# Altium PCB ConnectorBoard_PCB_r2.PcbDoc
Units mm, origin at the board's own origin, x right, y up, seen from the top; angles counter-clockwise.
Board outline 80 x 75 mm, 2 copper layers (Top Layer, Bottom Layer), stack 1.671 mm thick; 15 components, 16 nets, 61 pads, 0 vias.
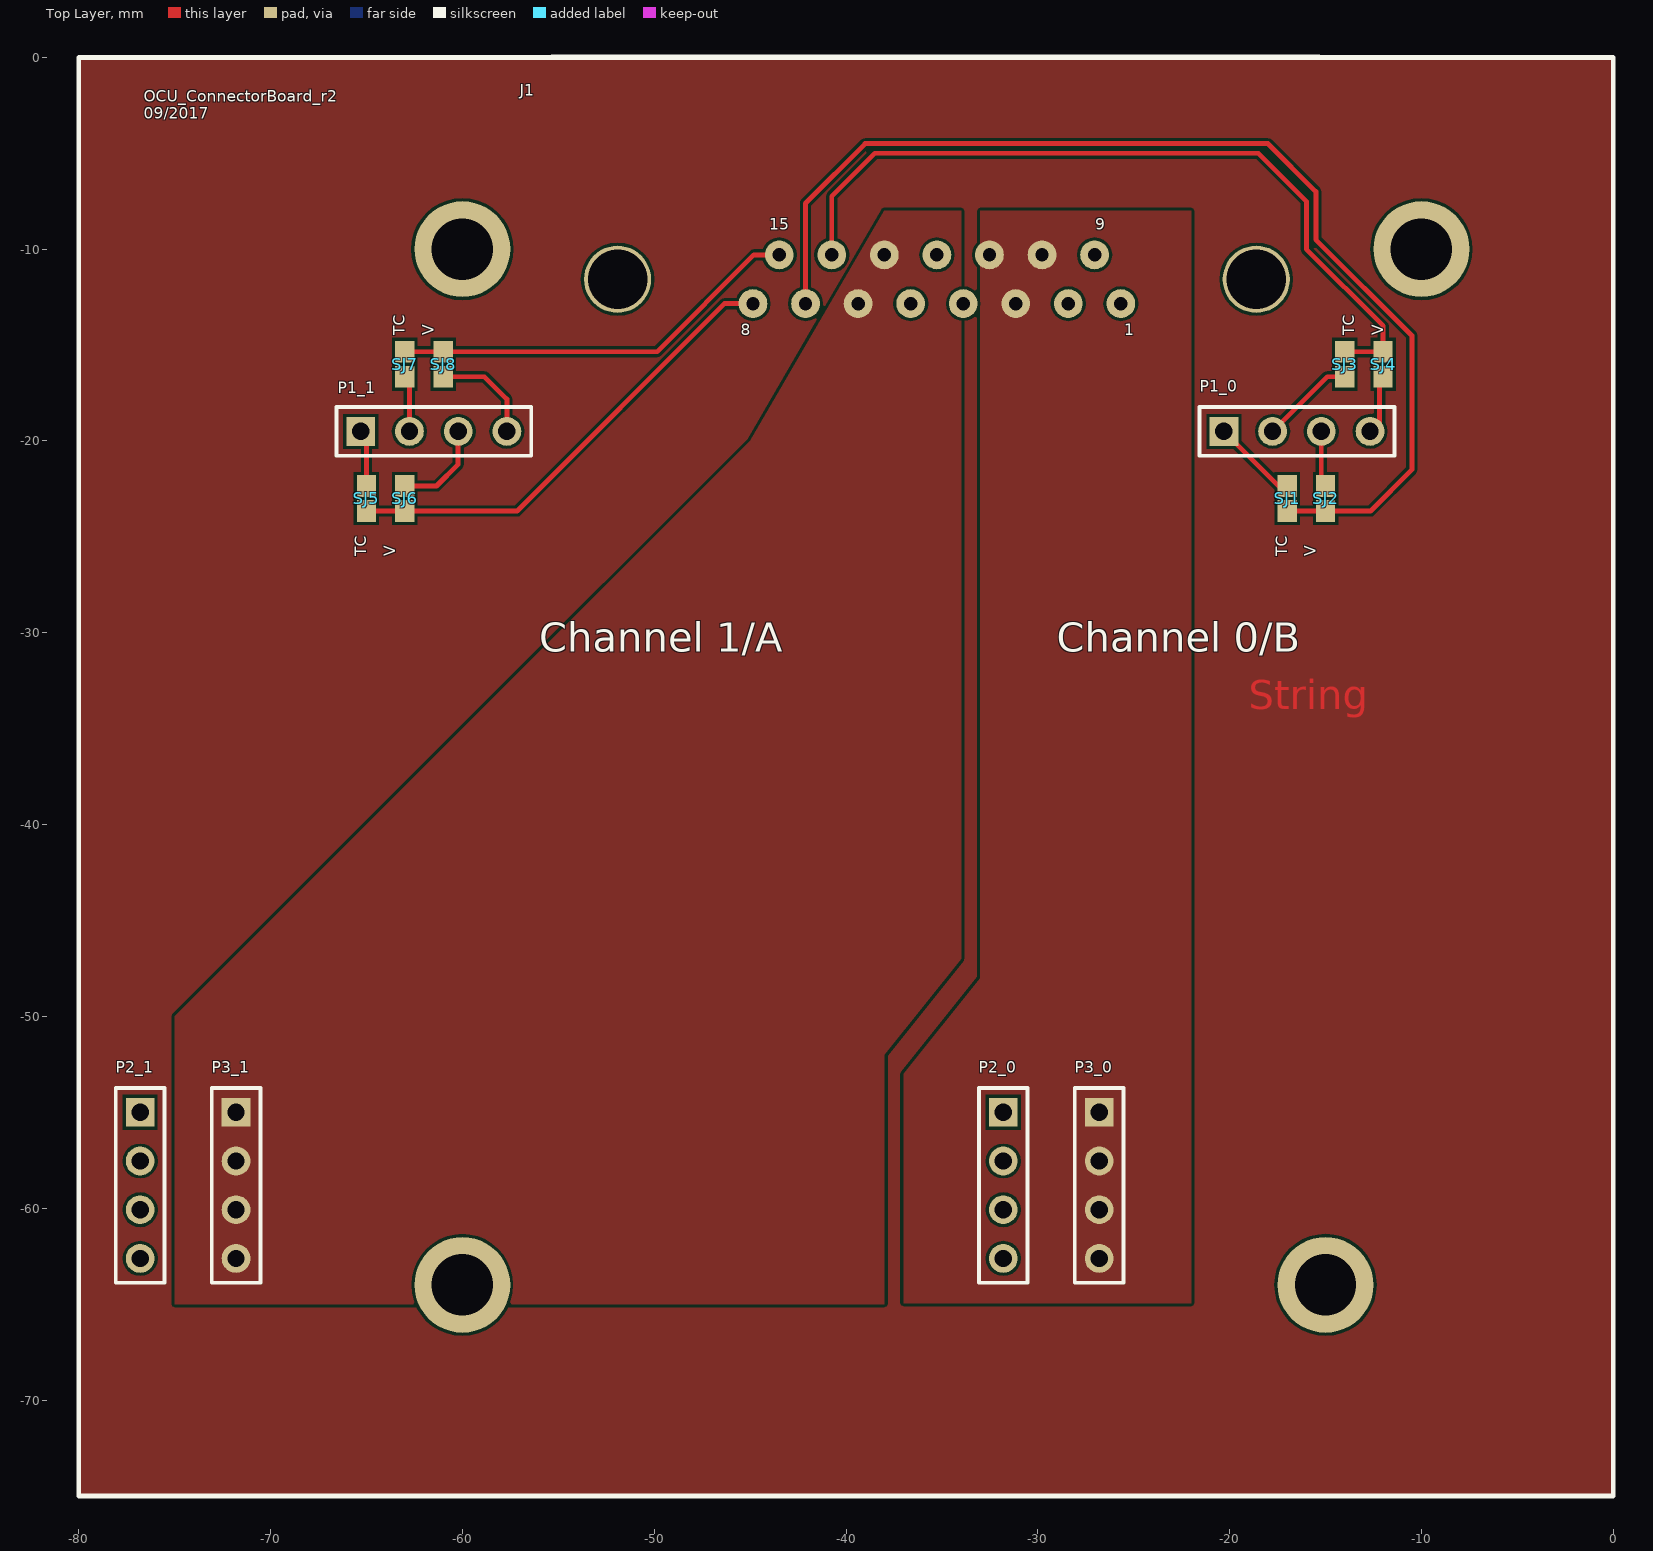
[diagram p0: Top Layer view]
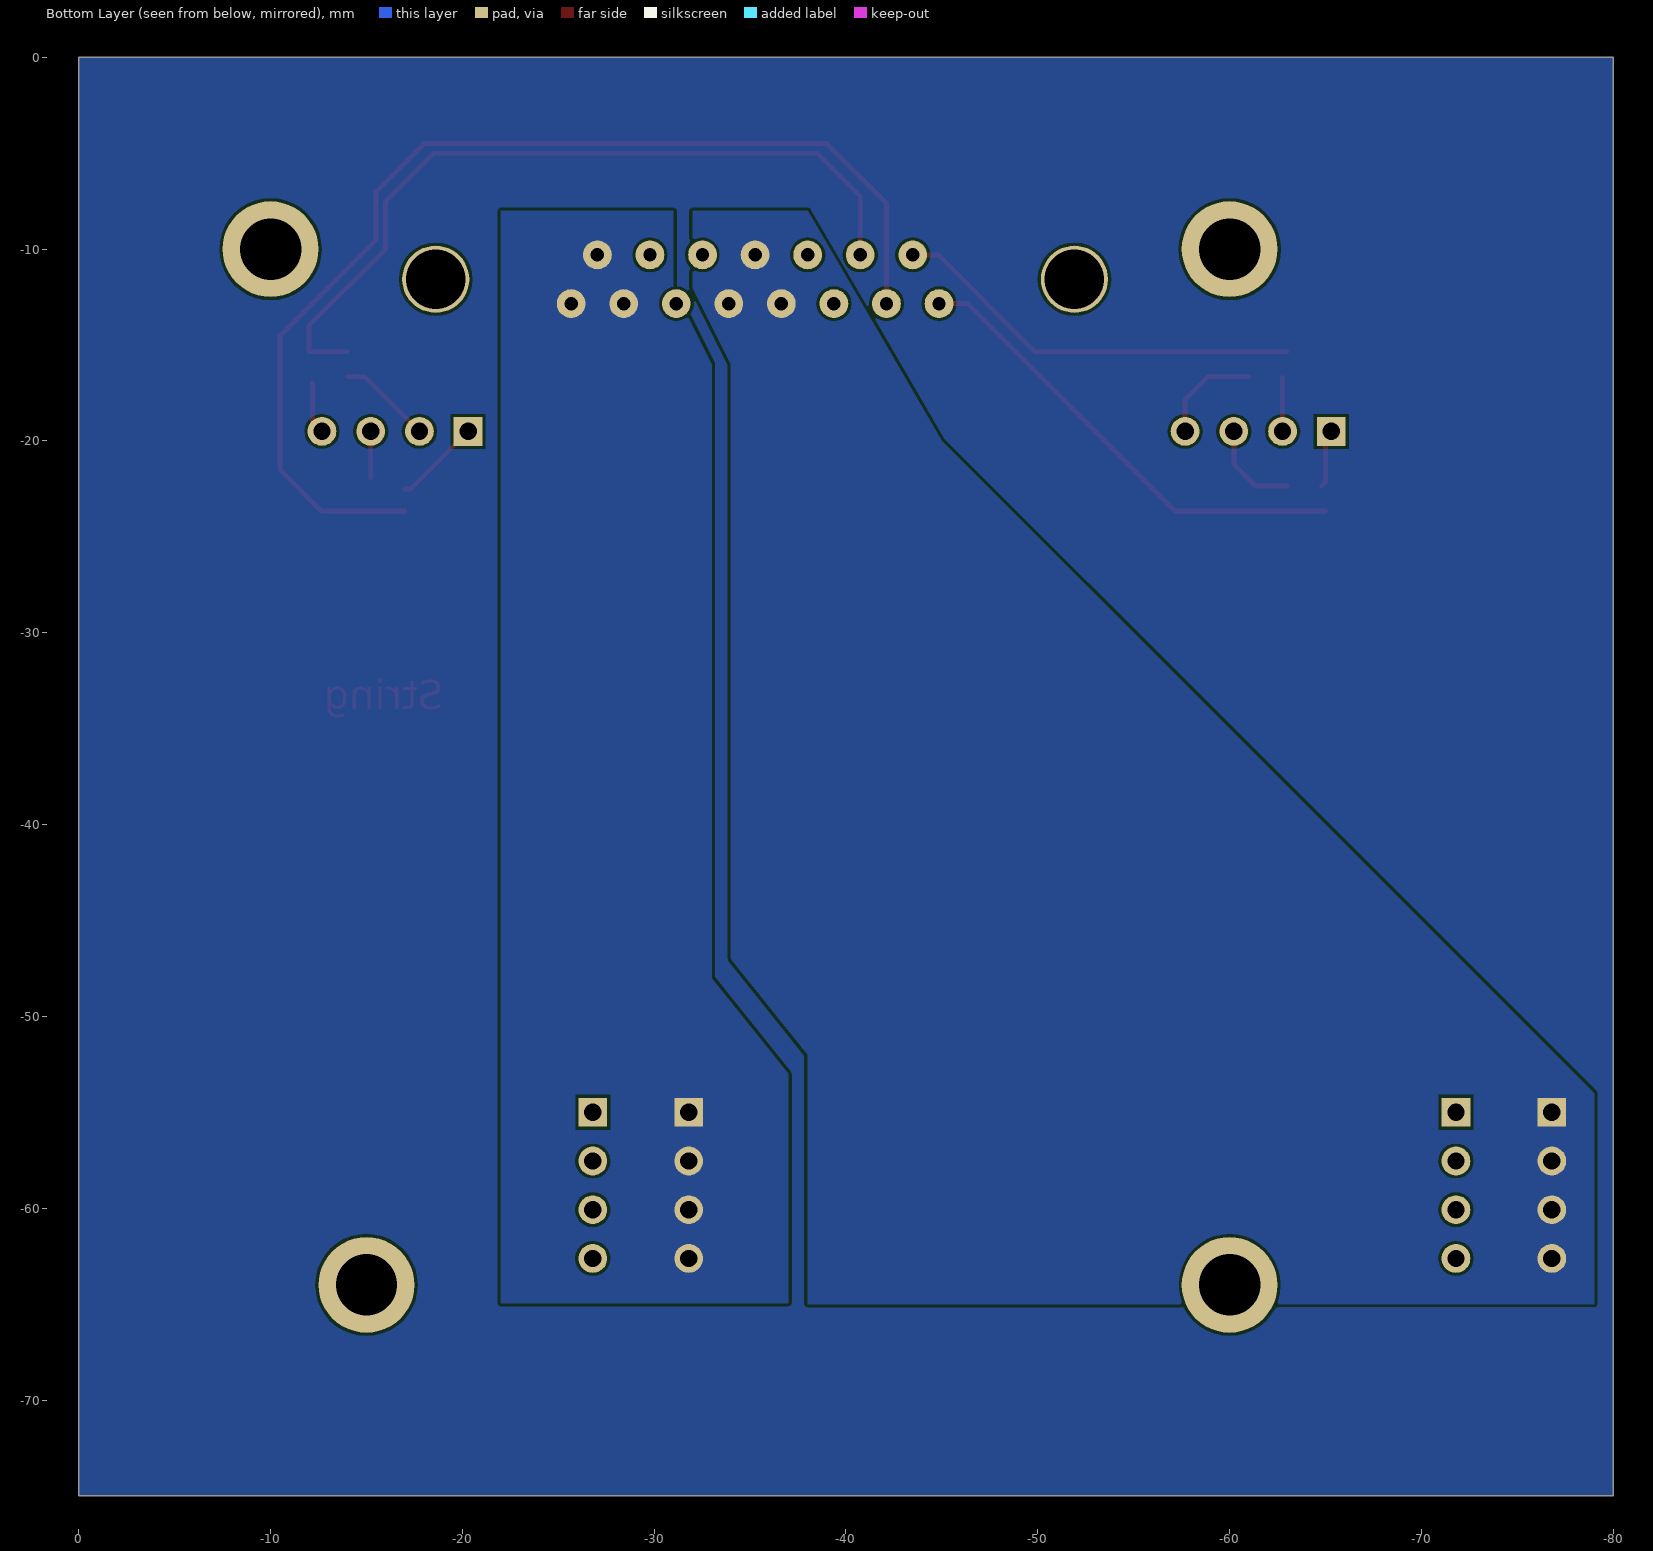
[diagram p1: Bottom Layer view, seen from below]

## Layer stack, top to bottom
Top Solder: solder mask 0.0102, Solder Resist, Dk 3.5
Top Layer: signal copper 0.0356
Dielectric 1: dielectric 1.6, FR-4, Dk 4.8
Bottom Layer: signal copper 0.0356
Bottom Solder: solder mask 0.0102, Solder Resist, Dk 3.5

## Board outline
-80,-75 -80,0 0,0 0,-75

## Design rules (kind name [scope] priority, off if disabled: settings)
Clearance [All] p1: gap=0.152
PolygonConnect [All] p1: connectstyle=Direct reliefconductorwidth=0.254 reliefentries=4 polygonreliefangle="90 Angle" airgapwidth=0.254
RoutingVias [All] p1: holewidth=0.711 width=1.27 viastyle="Through Hole" minholewidth=0.711 minwidth=1.27 maxholewidth=0.711 maxwidth=1.27
SolderMaskExpansion [All] p1: expansion=0.102
Width [All] p1: maxlimit=0.254 minlimit=0.254 preferedwidth=0.254
30 further rules are at their usual default settings.

## Components (designator, comment, footprint, x,y, rotation, side; value= is the part's Value field where it differs from the comment)
J1 "DSub 15 PCB mount" DSub15-female -35.325,-11.57 r0 top
P1_0 "Header 4" HDR1X4 -20.3,-19.5 r0 top
P1_1 "Header 4" HDR1X4 -65.3,-19.5 r0 top
P2_0 "Header 4" HDR1X4 -31.8,-55 r270 top
P2_1 "Header 4" HDR1X4 -76.8,-55 r270 top
P3_0 "Header 4" HDR1X4 -26.8,-55 r270 top
P3_1 "Header 4" HDR1X4 -71.8,-55 r270 top
SJ1 "Solder_jumper" SOLDER_JUMPER -17,-23 r270 top
SJ2 "Solder_jumper" SOLDER_JUMPER -15,-23 r270 top
SJ3 "Solder_jumper" SOLDER_JUMPER -14,-16 r90 top
SJ4 "Solder_jumper" SOLDER_JUMPER -12,-16 r90 top
SJ5 "Solder_jumper" SOLDER_JUMPER -65,-23 r270 top
SJ6 "Solder_jumper" SOLDER_JUMPER -63,-23 r270 top
SJ7 "Solder_jumper" SOLDER_JUMPER -63,-16 r90 top
SJ8 "Solder_jumper" SOLDER_JUMPER -61,-16 r90 top

## Footprints (in the part's own frame and the unit in brackets; to place one, negate y for a bottom-side part, rotate by r counter-clockwise, add the part's x,y. Pads: shape width x height; smd on the part's side, far side on the other; paste and mask are expansions set on the pad)
DSub15-female [mm] "Female 15pin DSub"
  round 1.5 hole 0.7 paste+0 mask+0: 1(9.655,-1.27) 2(6.915,-1.27) 3(4.175,-1.27) 4(1.435,-1.27) 5(-1.305,-1.27) 6(-4.045,-1.27) 7(-6.785,-1.27) 8(-9.525,-1.27) 9(8.285,1.27) 10(5.545,1.27) 11(2.805,1.27) 12(0.065,1.27) 13(-2.675,1.27) 14(-5.415,1.27) 15(-8.155,1.27)
  round 3.5 hole 3.1 paste+0 mask+0: 16(-16.585,0) 17(16.715,0)
  silkscreen extent -20,11.6 20,11.6, body extent -19.71,-3.43 19.71,17.75, height 13.65
HDR1X4 [mm] "Connector; Header; 4 Position"
  rect 1.5x1.5 hole 0.9: 1(0,0)
  round 1.5 hole 0.9: 2(2.54,0) 3(5.08,0) 4(7.62,0)
  silkscreen extent -1.27,-1.27 8.89,1.27
SOLDER_JUMPER [mm] "PCB solder jumper"
  rect 1.14x1 smd: 1(-0.65,0) 2(0.65,0)

## Part data
P1_0 P1_1 P2_0 P2_1 P3_0 P3_1: "Header, 4-Pin"
SJ1 SJ2 SJ3 SJ4 SJ5 SJ6 SJ7 SJ8: "PCB solder jumper"

## Free pads (board coordinates)
  round 5 hole 3.2 paste+0 mask+0: 0(-60,-64) 0(-60,-10) 0(-15,-64) 0(-10,-10)

## Nets (pads, with @x,y where several pads share a name; then routed paths per layer and width w, separated by ;. In a path a pad name is that pad's centre, name@x,y a point inside that pad or via, vN(x,y) a via of type N, cw(c..) or ccw(c..) an arc to the next point about the centre after c; other vN are vias at no path point)
NetJ1_7: J1.7 SJ1.2 SJ2.2 | length 58.1
  Top Layer w0.254: J1.7 -42.11,-7.61 -39,-4.5 -18,-4.5 -15.5,-7 -15.5,-9.5 -10.5,-14.5 -10.5,-21.5 -12.65,-23.65 SJ2.2 SJ1.2
NetJ1_8: J1.8 SJ5.2 SJ6.2 | length 24.6
  Top Layer w0.254: SJ5.2 SJ6.2 -57.15,-23.65 -46.34,-12.84 J1.8
NetJ1_14: J1.14 SJ3.2 SJ4.2 | length 41.3
  Top Layer w0.254: J1.14 -40.74,-7.24 -38.5,-5 -18.5,-5 -16,-7.5 -16,-10 -12,-14 SJ4.2 SJ3.2
NetJ1_15: J1.15 SJ7.2 SJ8.2 | length 21.6
  Top Layer w0.254: SJ7.2 SJ8.2 -49.85,-15.35 -44.8,-10.3 J1.15
OUTPUT_M_0: J1.1 J1.2 J1.9 P2_0.1 P2_0.2 P2_0.3 P2_0.4 | length 0.1
  Top Layer w0.254: J1.2@-28.5,-12.75 J1.2
OUTPUT_M_1: J1.4 J1.5 J1.12 P2_1.1 P2_1.2 P2_1.3 P2_1.4
OUTPUT_P_0: J1.3 J1.10 J1.11 P3_0.1 P3_0.2 P3_0.3 P3_0.4 | length 0.4
  Top Layer w0.254: J1.10 J1.10@-29.5,-10.02
OUTPUT_P_1: J1.6 J1.13 P3_1.1 P3_1.2 P3_1.3 P3_1.4
OVEN_M_0: P1_0.3 SJ2.1 | length 2.4
  Top Layer w0.254: SJ2.1@-15.22,-21.92 P1_0.3
OVEN_M_1: P1_1.3 SJ6.1 | length 5.6
  Top Layer w0.254: SJ6.1 -61.35,-22.35 -60.22,-21.22 P1_1.3 P1_1.3@-59.8,-19.92
OVEN_P_0: P1_0.4 SJ4.1 | length 2.5
  Top Layer w0.254: P1_0.4@-12.18,-19.5 SJ4.1@-12.18,-16.97
OVEN_P_1: P1_1.4 SJ8.1 | length 5.5
  Top Layer w0.254: SJ8.1 -58.85,-16.65 -57.68,-17.82 P1_1.4
TC_M_0: P1_0.1 SJ1.1 | length 4.8
  Top Layer w0.254: P1_0.1@-20.5,-19.7 P1_0.1 -17.3,-22.5 SJ1.1@-17,-22.5
TC_M_1: P1_1.1 SJ5.1 | length 3.1
  Top Layer w0.254: P1_1.1 -65,-19.8 -65,-22.15 SJ5.1@-64.8,-22.35
TC_P_0: P1_0.2 SJ3.1 | length 4.9
  Top Layer w0.254: P1_0.2 -14.91,-16.65 SJ3.1
TC_P_1: P1_1.2 SJ7.1 | length 2.8
  Top Layer w0.254: P1_1.2 SJ7.1@-62.76,-16.69
pads on no net: J1.16 J1.17

## Polygon pours and split planes (outlines as drawn)
OUTPUT_M_1 on Bottom Layer "OUTPUT_M_1_L02_P010" (solid, pour order 10): -79,-65 -38,-65 -38,-52 -34,-47 -34,-16 -32,-12 -32,-8 -38,-8 -45,-20 -60,-35 -79,-54
OUTPUT_M_0 on Bottom Layer "OUTPUT_M_0_L02_P008" (solid, pour order 8): -22,-35 -22,-64.951 -37,-64.951 -37,-53 -33,-48 -33,-16 -31,-12 -31,-8 -22,-8
no net on Bottom Layer "NONET_L02_P012" (solid, pour order 12): -80,-75 -80,0 0,0 0,-75
OUTPUT_P_0 on Top Layer "OUTPUT_P_0_L01_P002" (solid, pour order 2): -22,-35 -22,-64.951 -37,-64.951 -37,-53 -33,-48 -33,-8 -22,-8
OUTPUT_P_1 on Top Layer "OUTPUT_P_1_L01_P006" (solid, pour order 6): -75,-65 -38,-65 -38,-52 -34,-47 -34,-8 -38,-8 -45,-20 -60,-35 -75,-50
no net on Top Layer "NONET_L01_P014" (solid, pour order 14): 0,-75 -80,-75 -80,0 0,0

## Other copper
Top Layer:
  text "String" at -19,-34 h1.52

## Silkscreen, mask and mechanical layers (free items; w line width, h text height)
Top Overlay:
  the board outline again, w0.254
  text "OCU_ConnectorBoard_r2 / 09/2017" at -76.602,-3.199 h0.58
  text "15" at -44,-9 h0.58
  text "9" at -27,-9 h0.58
  text "TC" at -63,-14.5 h0.58 r90
  text "V" at -61.5,-14.5 h0.58 r90
  text "8" at -45.5,-14.5 h0.58
  text "1" at -25.5,-14.5 h0.58
  text "TC" at -13.5,-14.5 h0.58 r90
  text "V" at -12,-14.5 h0.58 r90
  text "TC" at -65,-26 h0.58 r90
  text "V" at -63.5,-26 h0.58 r90
  text "TC" at -17,-26 h0.58 r90
  text "V" at -15.5,-26 h0.58 r90
  text "Channel 1/A" at -56,-31 h1.52
  text "Channel 0/B" at -29,-31 h1.52
Mechanical 1:
  the board outline again, w0.254